# EAGLE board DS2482Controller (EAGLE 7.1.0)
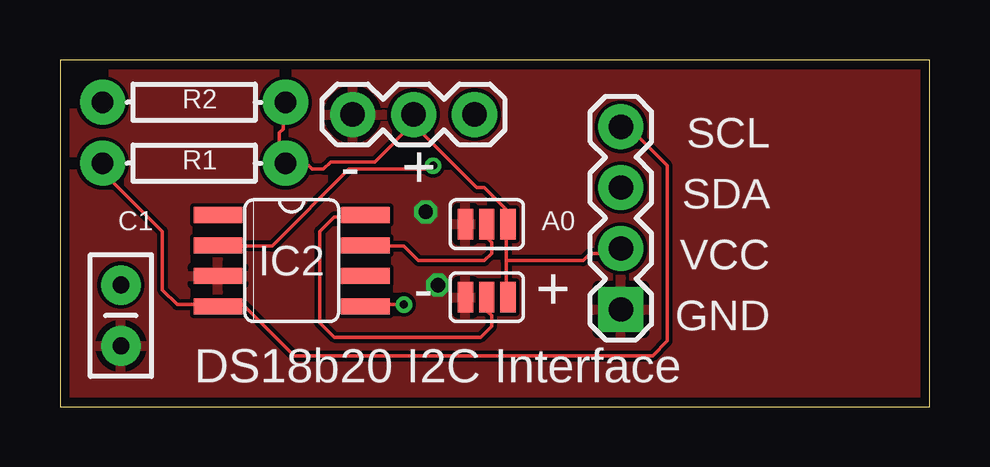
[diagram p0: board, top side]
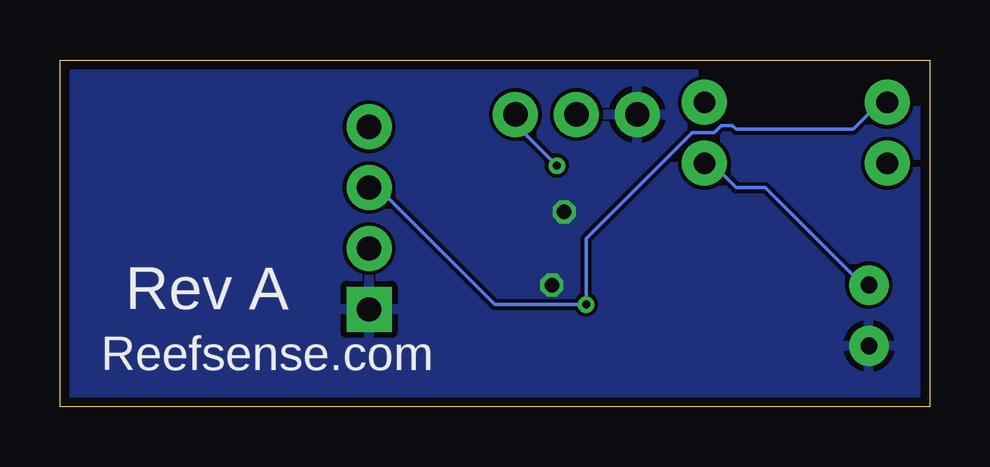
[diagram p1: board, bottom side, seen from below]

Size 36.25 x 14.47 mm. Coordinates in mm from the lower left corner, seen from the top.
Outline: 0,0 36.25,0 36.25,14.47 0,14.47 0,0
Copper layers (1*16): Top 0.0356mm / dielectric 1.5011mm / Bottom 0.0356mm
Design rules "LaenPCBOrder": minimum track width 6mil, minimum drill 13mil, track to track 6mil, track to pad 6mil, pad to pad 6mil, via to via 6mil, smd to smd 6mil, copper to edge 15mil, drill to drill 6mil, minimum pad ring 7mil, minimum via ring 7mil, stop-mask expansion 3mil, vias tented up to drill 0mil, thermal gap 10mil

## Footprints (pad centres in the part's own frame; a part is rotated, then mirrored left to right if it is on the bottom)
SJ_3 = smd 0.635 x 1.27: 1 -0.889,0; 2 0,0; 3 0.889,0
CAP-PTH-SMALL2 = drill 0.7 pad 1.651: 1 0,0; 2 2.54,0
SO08 = smd 0.66 x 2.032: 1 -1.905,-3.073; 2 -0.635,-3.073; 3 0.635,-3.073; 4 1.905,-3.073; 5 1.905,3.073; 6 0.635,3.073; 7 -0.635,3.073; 8 -1.905,3.073
1X04 = drill 1.016 pad 1.88 square: 1 0,0 | drill 1.016 pad 1.88: 2 2.54,0; 3 5.08,0; 4 7.62,0
1X03 = drill 1.016 pad 1.88: 1 0,0; 2 2.54,0; 3 5.08,0
AXIAL-0.3 = drill 0.9 pad 1.88: P$1 -3.81,0; P$2 3.81,0

## Placement (x,y rotation side)
A0  [SJ_3]  17.78,7.62 0 top
A1  [SJ_3]  17.78,4.57 0 top
C1  [CAP-PTH-SMALL2]  2.54,5.08 270 top
IC2  DS2482-100S  [SO08]  9.65,6.1 270 top
JP2  [1X04]  23.37,4.06 90 top
JP4  [1X03]  17.27,12.19 180 top
R1  2.2k  [AXIAL-0.3]  5.59,10.16 0 top
R2  2.2k  [AXIAL-0.3]  5.59,12.7 0 top

## Library data of the parts
A0 A1 = SparkFun-Retired
C1 = SparkFun-Capacitors
IC2 = 1wire
JP2 JP4 = SparkFun-Connectors
R1 R2 = SparkFun-Resistors

## Nets
5V: A0.3 A1.3 C1.1 JP2.2 JP4.2 R1.P$2 R2.P$2
GND: A0.1 A1.1 C1.2 IC2.3 JP2.1 JP4.3
N$4: A0.2 IC2.7
N$5: IC2.4 JP2.4 R1.P$1
N$6: IC2.5 JP2.3 R2.P$1
N$7: A1.2 IC2.8
N$12: IC2.2 JP4.1
VDD: IC2.1

## Tracks (layer width: path | path; a pad name or v marks a point on that pad's centre or on a via)
5V
  Top 0.152: R2.P$2 9.3,12.65 9.3,11.58 9.14,11.43 9.14,10.36 9.3,10.21 R1.P$2 9.45,10.06 10.36,10.06 10.52,9.91 10.97,9.91 11.28,10.21 13.11,10.21 14.78,11.89 | 18.59,7.62 18.59,6.1 | 18.59,6.1 18.59,4.57 A1.3 | 18.59,6.1 21.79,6.1 22.1,6.4 23.16,6.4 JP2.2 | 14.78,11.89 14.78,11.73 17.37,9.14 17.68,9.14 18.59,8.23 18.59,7.62 | 14.78,11.89 14.78,12.19 JP4.2 14.78,11.89 | 18.59,7.62 A0.3
  Bottom 0.152: C1.1 2.59,5.18 2.9,5.18 6.86,9.14 8.08,9.14 8.99,10.06 9.3,10.06 R1.P$2
GND  (via drill 0.6)
  other vias: 15.24,8.13 15.75,5.08
  pour Top: -1.52,23.37 59.94,23.37 59.94,-1.52 -1.02,-1.02
  pour Bottom: -1.02,-1.02 60.96,-2.03 60.45,24.38 -1.52,23.88
N$4
  Top 0.152: A0.2 17.83,7.62 17.83,7.01 17.98,6.86 17.98,6.4 17.68,6.1 14.94,6.1 14.33,6.71 12.8,6.71 IC2.7
N$5
  Top 0.152: R1.P$1 1.83,10.06 1.83,9.75 4.27,7.32 4.27,4.88 4.88,4.27 6.55,4.27 IC2.4 6.71,4.27 7.62,4.27 9.75,2.13 24.69,2.13 25.3,2.74 25.3,10.06 23.77,11.58 23.47,11.58 JP2.4
N$6  (via drill 0.33)
  Top 0.152: v14.33,4.27 12.8,4.27 IC2.5
  Bottom 0.152: JP2.3 23.01,9.14 18.14,4.27 v14.33,4.27 14.33,7.01 9.91,11.43 8.99,11.43 8.69,11.73 8.23,11.73 8.08,11.58 3.2,11.58 2.13,12.65 1.83,12.65 R2.P$1
N$7
  Top 0.152: A1.2 17.83,4.57 17.83,3.96 17.98,3.81 17.98,3.35 17.53,2.9 11.43,2.9 10.82,3.5 10.82,7.32 11.43,7.92 12.65,7.92 IC2.8
N$12  (via drill 0.33)
  Top 0.152: v15.54,10.06 15.39,9.91 12.04,9.91 8.84,6.71 6.71,6.71 IC2.2
  Bottom 0.152: v15.54,10.06 17.22,11.73 17.22,12.19 JP4.1

## Text on the board
tNames: SCL | SDA | - | + | VCC | - | + | GND | DS18b20 I2C Interface
bNames: Rev A | Reefsense.com